# Altium PCB PCB1.PcbDoc
Units mm, origin at the board's own origin, x right, y up, seen from the top; angles counter-clockwise.
Board outline 38.61 x 26.8 mm, 2 copper layers (Top Layer, Bottom Layer); 9 components, 7 nets, 24 pads, 0 vias.
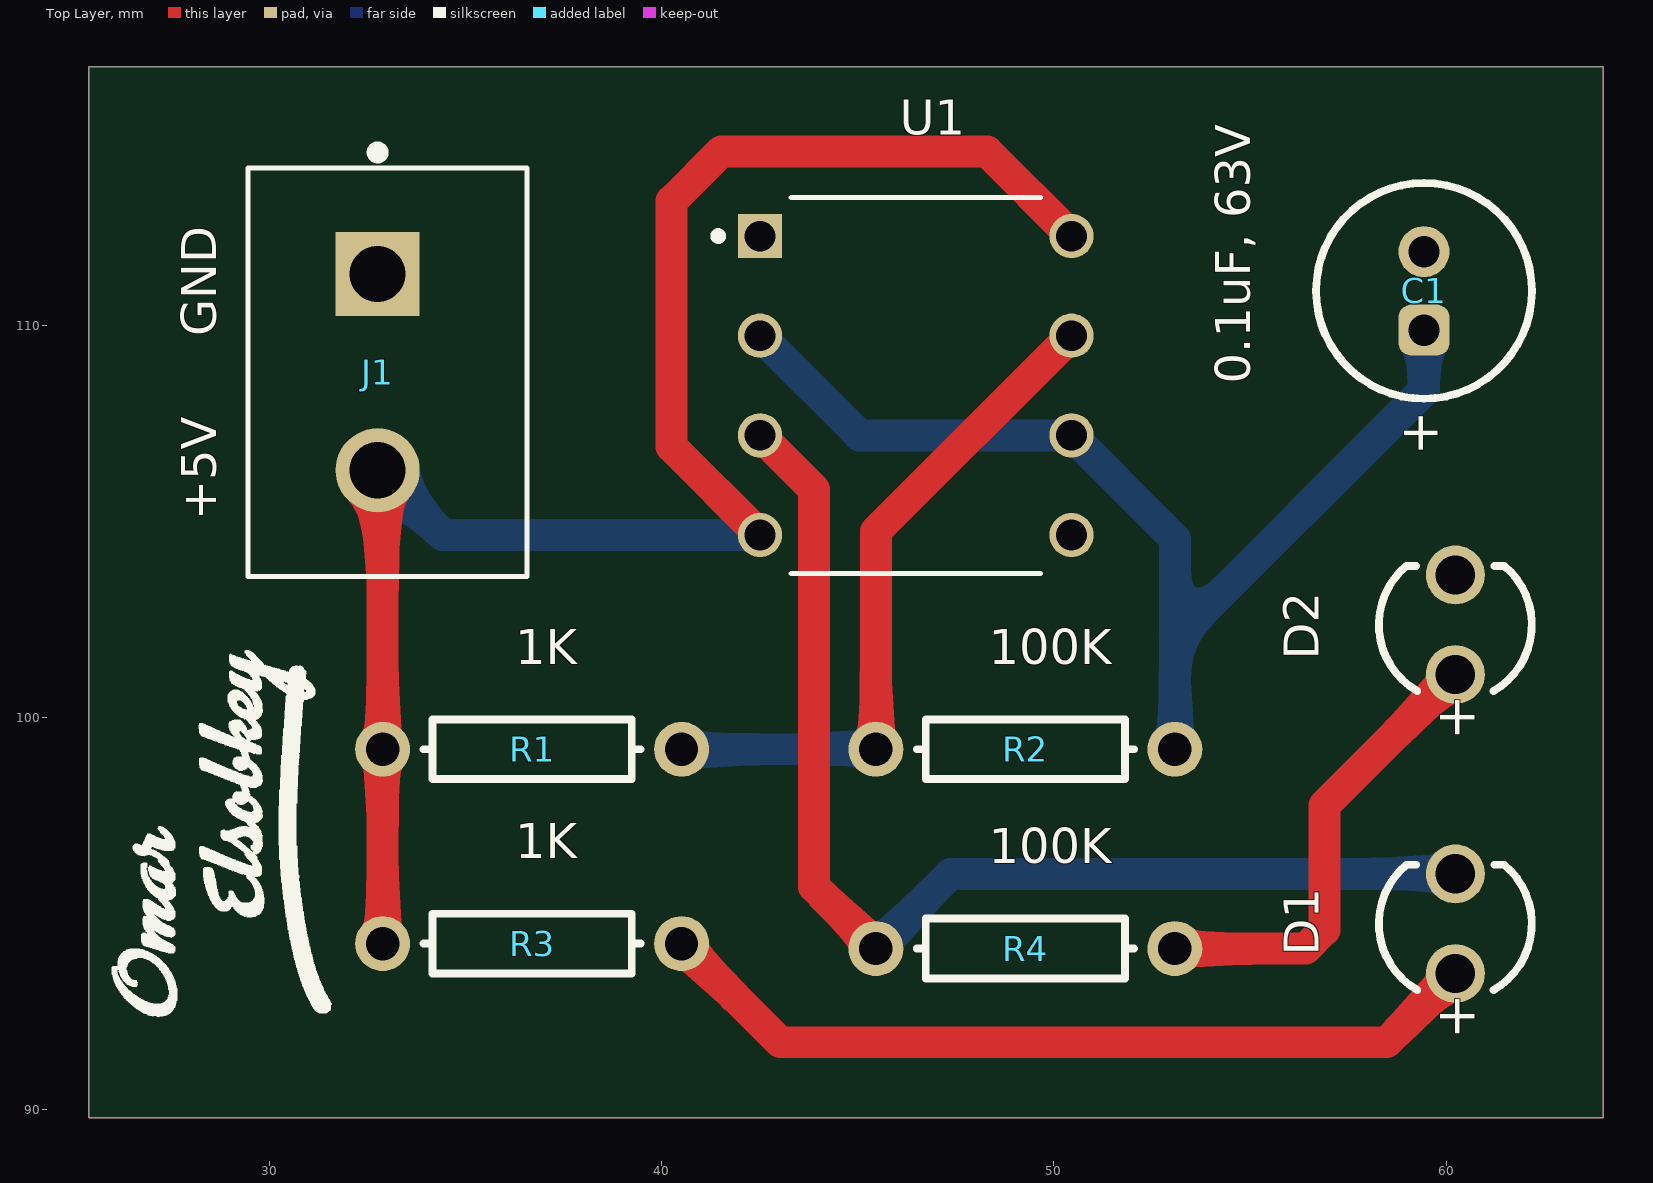
[diagram p0: Top Layer view]
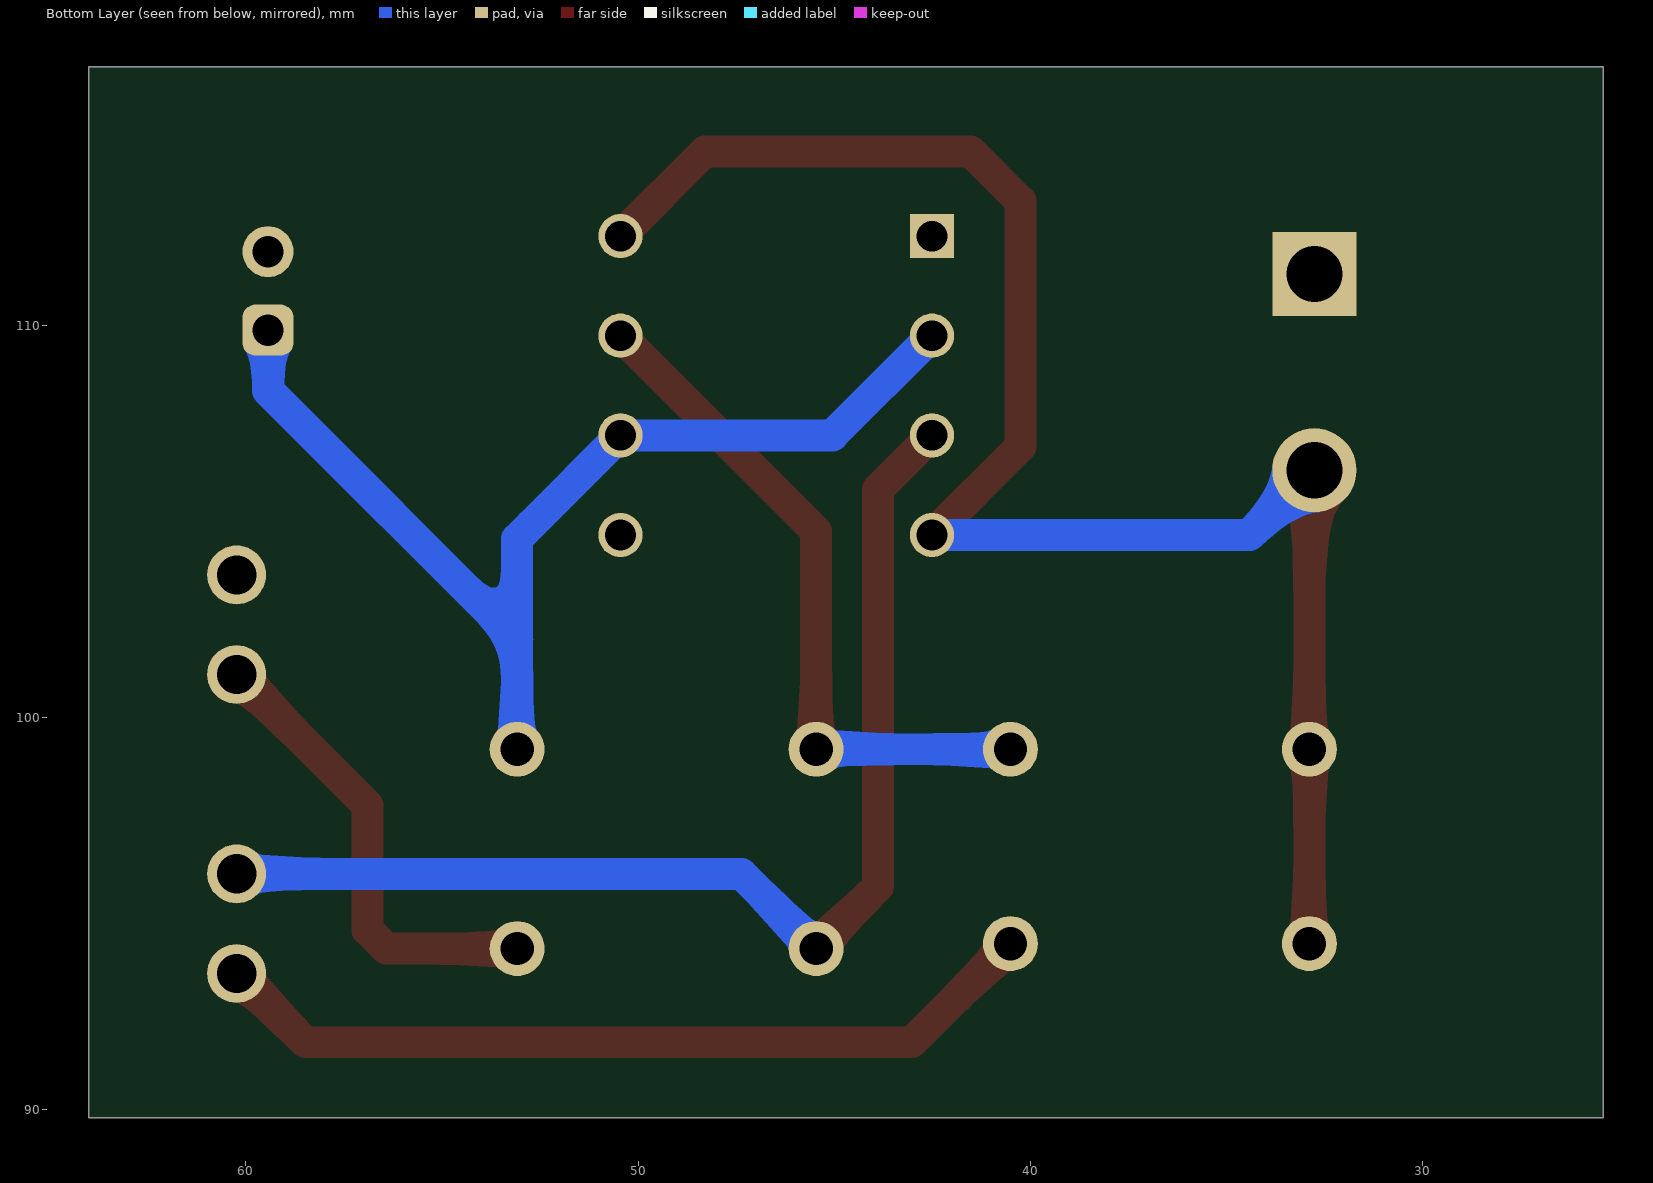
[diagram p1: Bottom Layer view, seen from below]
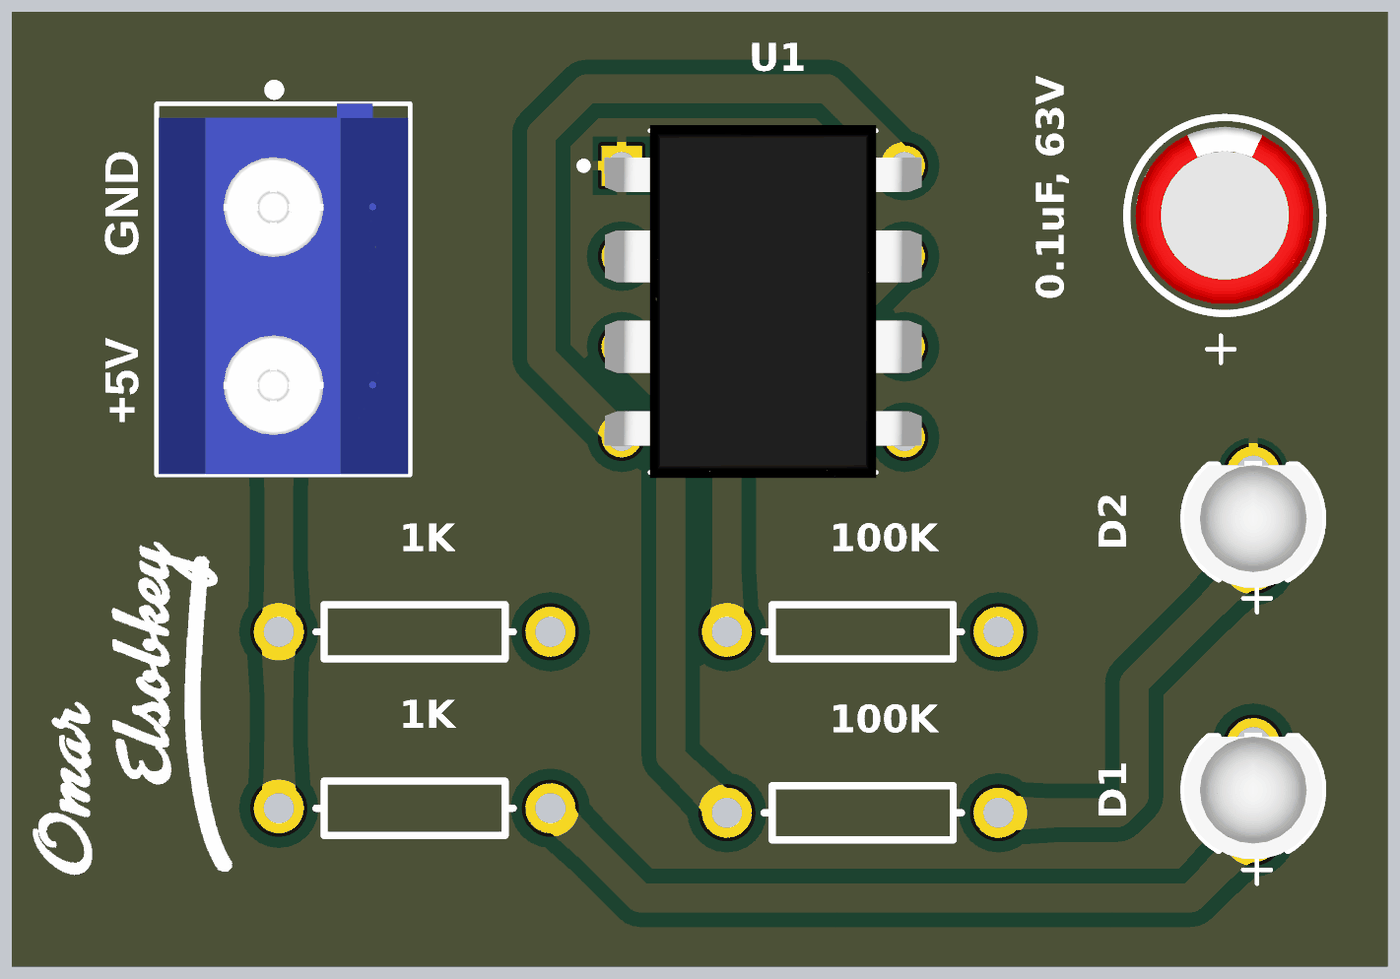
[diagram p2: 3D render of the assembled board from above, using the file's embedded part models]

## Layer stack, top to bottom
Top Solder: solder mask 0.0102, Solder Resist, Dk 3.5
Top Layer: signal copper 0.0356
Dielectric 1: dielectric 0.32, FR-4, Dk 4.8
Bottom Layer: signal copper 0.0356
Bottom Solder: solder mask 0.0102, Solder Resist, Dk 3.5

## Board outline
25.4,89.789 64.008,89.789 64.008,116.586 25.4,116.586

## Design rules (kind name [scope] priority, off if disabled: settings)
Clearance [All] p1: gap=0.406 ignorepadtopadclearanceinfootprint=FALSE
PolygonConnect [All] p1: connectstyle=Relief reliefconductorwidth=0.254 reliefentries=4 polygonreliefangle="90 Angle" airgapwidth=0.254
RoutingVias [All] p1: holewidth=0.711 width=1.27 viastyle="Through Hole" minholewidth=0.711 minwidth=1.27 maxholewidth=0.711 maxwidth=1.27
SolderMaskExpansion [All] p1: expansion=0.102 istentingtop=FALSE
UnRoutedNet [All] p1: checkbadconnections=TRUE
Width [All] p1: maxlimit=0.813 minlimit=0.813 preferedwidth=0.813
29 further rules are at their usual default settings.

## Components (designator, comment, footprint, x,y, rotation, side; value= is the part's Value field where it differs from the comment)
C1 "0.1uF, 63V" WCAP-ATG8_D5H11 59.436,110.871 r270 top
D1 "15400385A3590" WL-TIRW_D3.9H5.3 60.236,94.742 r90 top
D2 "15400385A3590" WL-TIRW_D3.9H5.3 60.236,102.362 r90 top
J1 "AK300/2" PTR_AK300/2-5,0-GRAU 32.766,108.799 r270 top
R1 "1K" AXIAL-0.3 36.703,99.187 r180 top
R2 "100K" AXIAL-0.3 49.276,99.187 r180 top
R3 "1K" AXIAL-0.3 36.703,94.234 r180 top
R4 "100K" AXIAL-0.3 49.276,94.107 r180 top
U1 "LM555CN" DIP794W45P254L959H508Q8 46.482,108.458 r0 top

## Footprints (in the part's own frame and the unit in brackets; to place one, negate y for a bottom-side part, rotate by r counter-clockwise, add the part's x,y. Pads: shape width x height; smd on the part's side, far side on the other; paste and mask are expansions set on the pad)
AXIAL-0.3 [mm] "Axial Device, Thru-Hole; 2 Leads; 0.3 in Pin Spacing"
  round 1.4 hole 0.85: 1(-3.81,0) 2(3.81,0)
  silkscreen extent -2.77,-0.76 2.77,0.76
DIP794W45P254L959H508Q8 [mm]
  rect 1.13x1.13 hole 0.78: 1(-3.97,3.81)
  round 1.13 hole 0.78: 2(-3.97,1.27) 3(-3.97,-1.27) 4(-3.97,-3.81) 5(3.97,-3.81) 6(3.97,-1.27) 7(3.97,1.27) 8(3.97,3.81)
  silkscreen extent -5.13,-4.8 3.17,4.8, body extent -5.28,-4.95 5.28,4.95, height 3.8
PTR_AK300/2-5,0-GRAU [mm]
  rect 2.145x2.145 hole 1.43: 1(-2.5,0)
  round 2.145 hole 1.43: 2(2.5,0)
  silkscreen extent -5.74,-3.3 5.21,3.81, body extent -5.22,-3.24 5.18,3.76, height 10
WCAP-ATG8_D5H11 [mm] "Aluminum Electrolytic Capacitors, 5x11mm"
  rrect50% 1.3x1.3 hole 0.8: 1(1,0)
  round 1.3 hole 0.8: 2(-1,0)
  silkscreen extent -2.75,-2.75 2.75,2.75, body extent -2.49,-2.5 2.5,2.5, height 11.31
WL-TIRW_D3.9H5.3 [mm] "THT Infrared Round Waterclear, body diameter 3.9mm"
  round 1.5 hole 1: 1(1.27,0) 2(-1.27,0)
  silkscreen extent -1.69,-1.95 1.5,1.95, body extent -1.95,-1.95 1.62,1.95, height 5.33

## Part data
C1: library part 860010772001, "WCAP-ATG8 Aluminum Electrolytic Capacitor, Radial, THT, D5xH11, 0.1uF, 63V", Capacitance=0.1uF, Capacitance Tolerance=+/-20%, Leakage Current=3uA, Manufacturer="Wurth Elektronik", Operating Temperature="-40 to +85degC", Rated Voltage=63VDC, Ripple Current=4mA, ComponentLink1Description=Manufacturer, ComponentLink1URL=http://www.we-online.de, ComponentLink2Description=Datasheet, ComponentLink2URL=https://www.we-online.com/catalog/datasheet/860010772001.pdf, Diameter=5mm, Dissipation Factor=9%, Endurance=2000h, Height=11mm, Manufacturer Part Number=860010772001, Mounting Technology=THT, Packaging="Ammo Pack", Published Date="October 2020", Technical Reference=ATBC110R10M063DSPA3B000
D1 D2: "WL-TIRW THT Infrared Round Waterclear, D3.9H5.3, 60mW/sr, 1.5V, 35deg", Emitting color=Infrared, Forward Voltage=1.5V, Manufacturer="Wurth Elektronik", Operating Temperature="-40 to +85degC", Centroid Wavelength=845nm, Chip Technology=AlGaAs, ComponentLink1Description=Manufacturer, ComponentLink1URL=http://www.we-online.de, ComponentLink2Description=Datasheet, ComponentLink2URL=https://www.we-online.com/catalog/datasheet/15400385A3590.pdf, Manufacturer Part Number=15400385A3590, Mounting Technology=THT, Packaging=Bulk, Peak Wavelength=850nm, Published Date="August 2020", Radiant Intensity typ.=60mW/sr, Size=D3.9H5.3, Viewing Angle=35deg
J1: library part AK300/2-5,0-GRAU, "Terminal block; 5mm; angled 45Â°; ways: 2", Package=None, Availability=Unavailable, MF="PTR Messtechnik", MP=AK300/2-5,0-GRAU, Price=None, SnapEDA_Link=https://www.snapeda.com/parts/AK300/2-5%2C0-GRAU/PTR%20Messtechnik/view-part/556894/?ref=snap
R1 R2 R3 R4: library part Res1, "Resistor", LatestRevisionDate=17-Jul-2002, LatestRevisionNote="Re-released for DXP Platform.", PackageDescription="Axial Device, Thru-Hole; 2 Leads; 0.3 in Pin Spacing", PackageReference=AXIAL-0.3, Published=8-Jun-2000, Publisher="Altium Limited"
U1: Package=None, Availability=Unavailable, MF="{'manufacturer': u'ON Semiconductor'}", MP=LM555CN/NOPB, Price=None

## Nets (pads, with @x,y where several pads share a name; then routed paths per layer and width w, separated by ;. In a path a pad name is that pad's centre, name@x,y a point inside that pad or via, vN(x,y) a via of type N, cw(c..) or ccw(c..) an arc to the next point about the centre after c; other vN are vias at no path point)
2: C1.1 R2.1 U1.2 U1.6 | length 28.6
  Bottom Layer w0.813: U1.2 45.052,107.188 U1.6 52.74,104.9 53.086,104.554 53.086,101.981 ; R2.1 53.086,101.981 ; C1.1 59.436,108.331 53.086,101.981
7: R1.1 R2.2 U1.7 | length 17.6
  Top Layer w0.813: R2.2 45.466,104.742 U1.7
  Bottom Layer w0.813: R1.1 R2.2
GND: C1.2 D2.1 J1.1 U1.1
NetD1_2: D1.2 R3.1 | length 21.5
  Top Layer w0.813: R3.1 43.028,91.719 58.483,91.719 D1.2
NetD2_2: D2.2 R4.1 | length 11.9
  Top Layer w0.813: R4.1 56.42,94.107 56.896,94.583 56.896,97.752 D2.2
out: D1.1 R4.2 U1.3 | length 29.9
  Top Layer w0.813: U1.3 43.891,105.809 43.891,95.682 R4.2
  Bottom Layer w0.813: R4.2 47.371,96.012 D1.1
VCC: J1.2 R1.2 R3.2 U1.4 U1.8 | length 43.6
  Top Layer w0.813: J1.2 32.893,106.172 R1.2 R3.2 ; U1.4 40.259,106.901 40.259,113.157 41.529,114.427 48.293,114.427 U1.8
  Bottom Layer w0.813: J1.2 34.417,104.648 U1.4
pads on no net: U1.5

## Polygon pours and split planes (outlines as drawn)
GND on Top Layer "top_GND" (solid, remove dead copper, shelved, pour order 5): 25.4,89.789 64.008,89.789 64.008,116.586 25.4,116.586
GND on Bottom Layer "bottom_GND" (solid, remove dead copper, shelved, pour order 6): 25.4,89.789 64.008,89.789 64.008,116.586 25.4,116.586

## Silkscreen, mask and mechanical layers (free items; w line width, h text height)
Top Overlay:
  drawing of 3 lines, arcs and shapes, not listed
  text "GND" at 28.946,109.72 h1.52 r90
  text "+5V" at 28.946,105.021 h1.52 r90

## Text inside footprints (layer, text, board x,y; h text height)
C1: Top Overlay "+" at 58.936,107.821 h1 r270
D1: Top Overlay "+" at 60.736,91.792 h1.02 r90
D2: Top Overlay "+" at 60.736,99.412 h1.02 r90